# EAGLE board gnat-scale_0.1.0 (EAGLE 7.6.0)
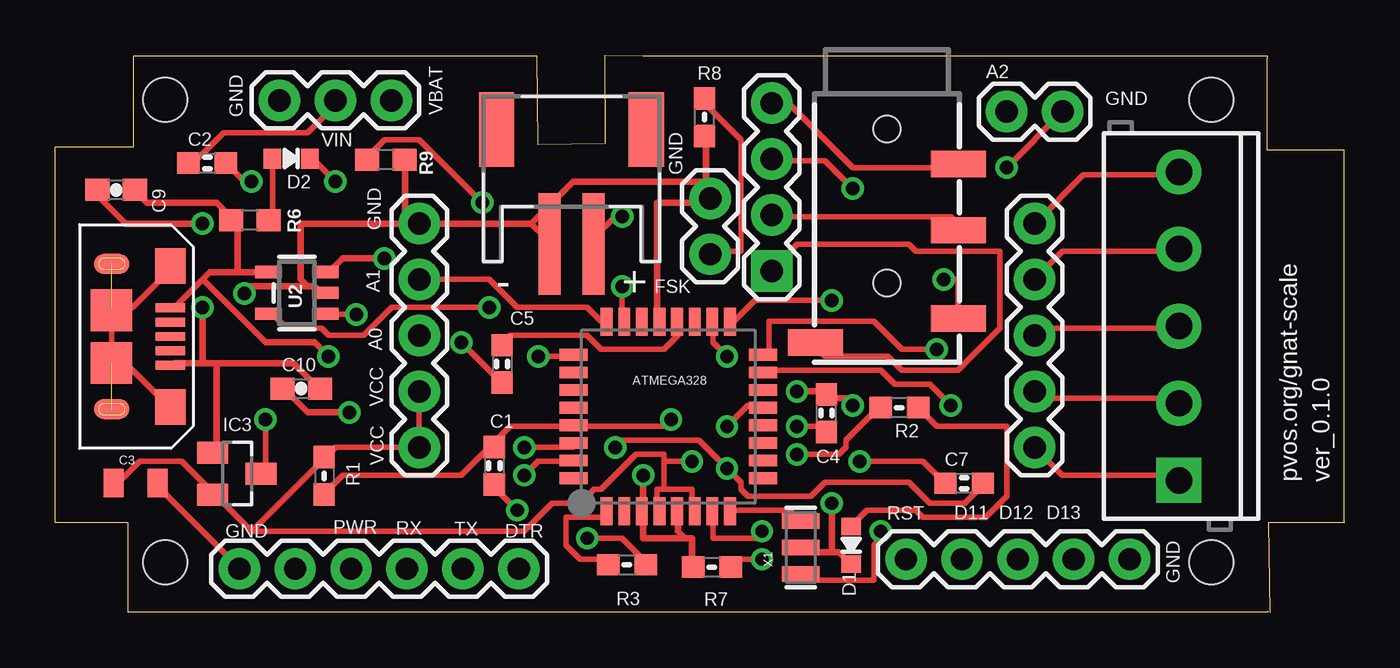
[diagram p0: board, top side]
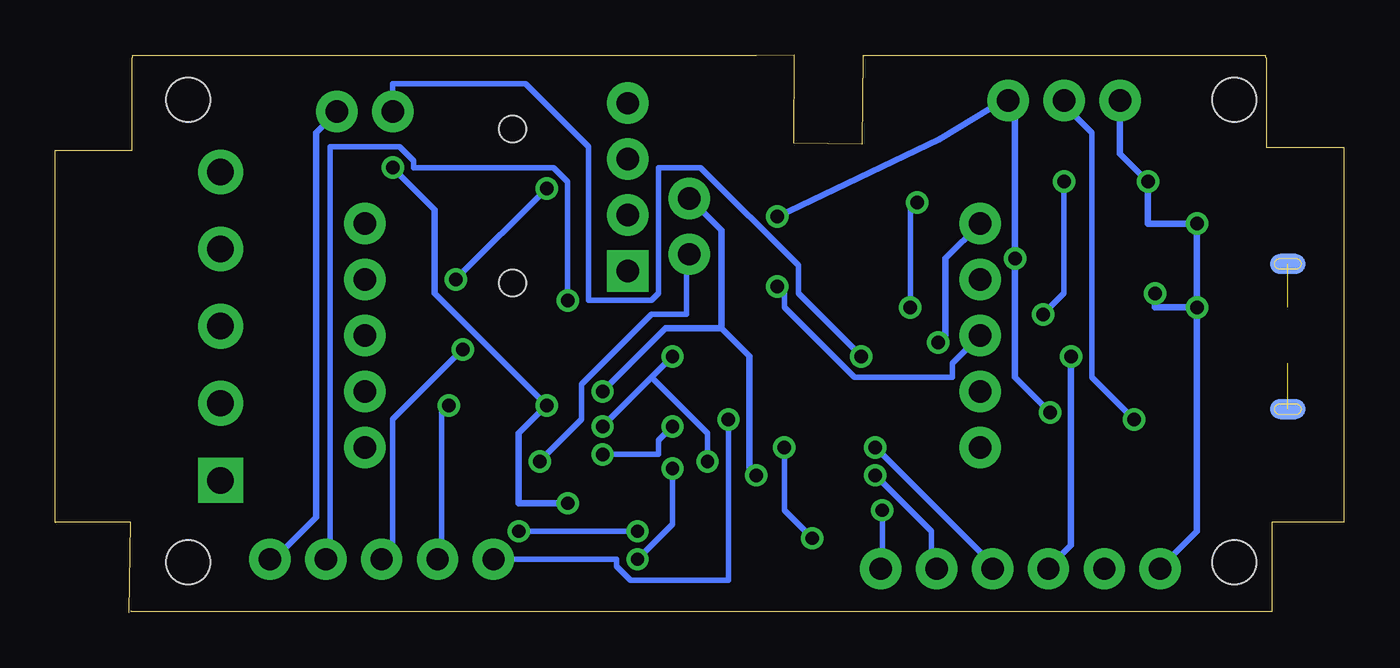
[diagram p1: board, bottom side, seen from below]

Size 58.55 x 25.31 mm. Coordinates in mm from the lower left corner, seen from the top.
Outline: 3.3,0.03 3.3,4.09 0,4.09 0,21.11 3.56,21.11 3.56,25.18
Outline: 55.19,0 55.12,4.09 58.55,4.09
Outline: 58.55,4.09 58.55,4.08
Outline: 3.3,0.03 55.1,0.03 55.1,0.08
Outline: 58.55,4.09 58.55,20.98 55.05,20.98 55.05,25.18
Outline: 3.56,25.18 3.56,25.28 21.88,25.28 21.9,21.27 25,21.29 24.97,25.31 26.7,25.28 55.05,25.28 55.05,25.18
Copper layers (1*16): Top 0.035mm / dielectric 1.5mm / Bottom 0.035mm
Design rules "default": minimum track width 10mil, minimum drill 24mil, track to track 8mil, track to pad 8mil, pad to pad 8mil, via to via 8mil, smd to smd 8mil, copper to edge 40mil, drill to drill 8mil, minimum pad ring 10mil, minimum via ring 8mil, stop-mask expansion 4mil, vias tented up to drill 0mil, thermal gap 10mil
Net classes: 1 power: width 0.305 mm
Holes 2 mm at 5,2.28 5,23.28 52.5,2.28 52.5,23.28

## Footprints (pad centres in the part's own frame; a part is rotated, then mirrored left to right if it is on the bottom)
TQFP32-08 = smd 1.27 x 0.533: 1 -4.293,2.8; 2 -4.293,2; 3 -4.293,1.2; 4 -4.293,0.4; 5 -4.293,-0.4; 6 -4.293,-1.2; 7 -4.293,-2; 8 -4.293,-2.8; 17 4.293,-2.8; 18 4.293,-2; 19 4.293,-1.2; 20 4.293,-0.4; 21 4.293,0.4; 22 4.293,1.2; 23 4.293,2; 24 4.293,2.8 | smd 0.533 x 1.27: 9 -2.8,-4.293; 10 -2,-4.293; 11 -1.2,-4.293; 12 -0.4,-4.293; 13 0.4,-4.293; 14 1.2,-4.293; 15 2,-4.293; 16 2.8,-4.293; 25 2.8,4.293; 26 2,4.293; 27 1.2,4.293; 28 0.4,4.293; 29 -0.4,4.293; 30 -1.2,4.293; 31 -2,4.293; 32 -2.8,4.293
0603-CAP = smd 1.016 x 0.965: 1 -0.85,0; 2 0.85,0
0805-CAP = smd 0.902 x 1.3: 1 -1,0; 2 1,0
0603-CAP' = smd 1.1 x 1: 1 -0.85,0; 2 0.85,0
JST-PH-2-SMT-RA = smd 1 x 4.6: 1 1,-3.7; 2 -1,-3.7 | smd 1.6 x 3.4: NC1 -3.4,1.5; NC2 3.4,1.5
0603-LED = smd 0.8 x 0.9: MINUS -0.85,0; PLUS 0.85,0
1X06 = drill 1.016 pad 1.88: 1 0,0; 2 2.54,0; 3 5.08,0; 4 7.62,0; 5 10.16,0; 6 12.7,0
SOT23 = smd 1 x 1.4: 1 -0.95,-1.1; 2 0.95,-1.1; 3 0,1.1
1X02 = drill 1.016 pad 1.88: 1 0,0; 2 2.54,0
1X04 = drill 1.016 pad 1.88 square: 1 0,0 | drill 1.016 pad 1.88: 2 2.54,0; 3 5.08,0; 4 7.62,0
1X05 = drill 1.016 pad 1.88: 1 0,0; 2 2.54,0; 3 5.08,0; 4 7.62,0; 5 10.16,0
SCREWTERMINAL-3.5MM-5 = drill 1.2 pad 2.032 square: 1 0,0 | drill 1.2 pad 2.032: 2 3.5,0; 3 7,0; 4 10.5,0; 5 14,0
MICROUSB-RIGHT = smd 0.4 x 1.35: 1 -1.3,1.27; 2 -0.65,1.27; 3 0,1.27; 4 0.65,1.27; 5 1.3,1.27 | smd 0.9 x 1.6: S1 -3.3,-1.4; S2 3.3,-1.4 | smd 1.6 x 1.4: S3 -3.2,1.27; S4 3.2,1.27 | smd 1.9 x 1.9: S5 -1.2,-1.405; S6 1.2,-1.405 | smd 0.9 x 1.6 bottom: S7 -3.3,-1.4; S8 3.3,-1.4
1X03 = drill 1.016 pad 1.88: 1 0,0; 2 2.54,0; 3 5.08,0
AUDIO-JACK-TRRS-SMD = smd 1.2 x 2.5: EARTH 11.3,-3.25; RING1 6.2,3.25; RING2 3.2,3.25; TIP 10.2,3.25 | hole 1.2: 1.6,0; 8.6,0
0603-RES = smd 1.016 x 0.965: 1 -0.85,0; 2 0.85,0
0603-NO = smd 1.1 x 1: 1 -0.85,0; 2 0.85,0
SOT23-5 = smd 0.55 x 1.2: 1 -0.95,-1.3; 2 0,-1.3; 3 0.95,-1.3; 4 0.95,1.3; 5 -0.95,1.3
RESONATOR-SMD = smd 0.7 x 1.7: 1 -1.2,0; 2 0,0; 3 1.2,0

## Placement (x,y rotation side)
ATMEGA328  ATMega-328  [TQFP32-08]  27.84,8.9 90 top
C1  0.1  [0603-CAP]  19.95,6.66 270 top
C2  1u  [0603-CAP]  6.92,20.4 0 top
C3  10u  [0805-CAP]  3.66,5.87 0 top
C4  0.1  [0603-CAP]  35.03,9.05 90 top
C5  0.1  [0603-CAP]  20.3,11.28 270 top
C7  0.47uF  [0603-CAP]  41.28,5.87 0 top
C9  10uF  [0603-CAP']  2.77,19.18 180 top
C10  10uF  [0603-CAP']  11.18,10.17 0 top
CNL1  [JST-PH-2-SMT-RA]  23.45,20.43 0 top
D1  LED0603  [0603-LED]  36.15,3.06 90 top
D2  LED0603  [0603-LED]  10.73,20.61 180 top
FTDI  FTDI  [1X06]  8.36,1.99 0 top
IC3  MCP1703CB  [SOT23]  8.26,6.31 270 top
J1  [1X02]  29.75,16.26 90 top
J2  [1X04]  32.54,15.5 90 top
J3  [1X05]  16.54,17.66 270 top
J4  [1X05]  44.48,17.66 270 top
J6  [SCREWTERMINAL-3.5MM-5]  51.03,6 90 top
J7  [MICROUSB-RIGHT]  3.97,12.53 270 top
J8  [1X02]  45.75,22.74 180 top
J9  [1X05]  48.8,2.42 180 top
J10  [1X03]  10.19,23.25 0 top
JP1  AUDIO-JACK3  [AUDIO-JACK-TRRS-SMD]  37.78,23.55 270 top
R1  10k  [0603-RES]  12.22,6.2 270 top
R2  1k5  [0603-RES]  38.33,9.3 180 top
R3  10k  [0603-RES]  25.97,2.17 0 top
R6  10K  [0603-NO]  8.85,17.81 180 top
R7  4.7k  [0603-RES]  29.83,2.06 0 top
R8  10k  [0603-RES]  29.5,22.49 90 top
R9  4.7K  [0603-NO]  15.02,20.56 180 top
U2  MCP73831T-2ACI/OT  [SOT23-5]  10.98,14.51 90 top
X1  16 MHz  [RESONATOR-SMD]  33.86,2.95 90 top

## Library data of the parts
ATMEGA328 C1-C5 C7 D1 D2 R1-R3 R7 R8 = LowPowerLab
C9 C10 X1 = SparkFun
CNL1 = adafruit
FTDI J1 J3 J4 J8-J10 JP1 = SparkFun-Connectors
IC3 = linear
J2 = SparkFun-Connectors; PROD_ID: CONN-09696
J6 = SparkFun-Connectors; PROD_ID: Combine 8288+8399
J7 = MF_Connectors
R6 R9 U2 = microbuilder

## Nets
A0: ATMEGA328.23 J3.3
A1: ATMEGA328.24 J3.2
A2: ATMEGA328.25 J8.2
A3: ATMEGA328.26
A4_SDA: ATMEGA328.27
A5_SCL: ATMEGA328.28
A6: ATMEGA328.19
A7: ATMEGA328.22
AREF: ATMEGA328.20 C5.1
D0_RX: ATMEGA328.30 FTDI.4
D1_TX: ATMEGA328.31 FTDI.5
D2: ATMEGA328.32
D3: ATMEGA328.1 R3.1
D4: ATMEGA328.2
D5: ATMEGA328.9
D6: ATMEGA328.10
D7: ATMEGA328.11
D8: ATMEGA328.12
D9: ATMEGA328.13 R2.2
D10_SS: ATMEGA328.14
D11_MOSI: ATMEGA328.15 J9.4
D12_MISO: ATMEGA328.16 J9.3
D13_SCK: ATMEGA328.17 J9.2
GND [power]: ATMEGA328.3 ATMEGA328.5 ATMEGA328.21 C2.2 C3.2 C4.2 C5.2 C9.2 C10.2 CNL1.2 D1.MINUS FTDI.1 IC3.1 J1.2 J3.1 J7.5 J8.1 J9.1 J10.1 R7.1 R8.1 R9.1 U2.2 X1.2
N$1: ATMEGA328.7 X1.1
N$2: D1.PLUS R2.1
N$3: C7.2 R3.2 R7.2
N$4: C7.1 J1.1 R8.2
N$5: J2.1 JP1.EARTH
N$6: J2.2 JP1.RING1
N$7: J2.3 JP1.TIP
N$8: J2.4 JP1.RING2
N$9: J4.5 J6.1
N$10: J4.4 J6.2
N$11: J4.3 J6.3
N$12: J4.2 J6.4
N$13: J4.1 J6.5
N$16: R9.2 U2.5
N$17: D2.MINUS U2.1
N$18: D2.PLUS R6.1
N$20: C1.2 FTDI.6
N$21: ATMEGA328.8 X1.3
PWR [power]: C9.1 FTDI.3 J7.1 R6.2 U2.4
RST: ATMEGA328.29 C1.1 J9.5 R1.2
SLD: J7.S1 J7.S2 J7.S3 J7.S4 J7.S5 J7.S6 J7.S7 J7.S8
VBAT [power]: C10.1 CNL1.1 J10.3 U2.3
VCC: ATMEGA328.4 ATMEGA328.6 ATMEGA328.18 C3.1 C4.1 IC3.2 J3.4 J3.5 R1.1
VIN: C2.1 IC3.3 J10.2

## Tracks (layer width: path | path; a pad name or v marks a point on that pad's centre or on a via)
A0  (via drill 0.61)
  Top 0.254: v25.75,14.8 25.75,13.22 ATMEGA328.23
  Bottom 0.254: v25.75,14.8 25.43,14.49 25.43,13.85 22.26,10.68 17.81,10.68 17.81,11.31 J3.3
A1
  Top 0.254: J3.2 19.72,15.12 20.99,13.85 24.16,13.85 24.8,13.22 ATMEGA328.24
A2  (via drill 0.61)
  Top 0.254: v21.94,11.63 23.53,11.63 ATMEGA328.25
  Bottom 0.254: v21.94,11.63 24.8,14.49 24.8,15.76 29.24,20.2 31.15,20.2 31.15,14.49 31.46,14.17 34.32,14.17 34.32,21.15 37.18,24.01 43.21,24.01 J8.2
AREF
  Top 0.254: C5.1 20.35,12.26 20.67,12.58 24.16,12.58 24.8,11.95 27.65,11.95 28.29,12.58 28.29,12.9 ATMEGA328.20
D0_RX  (via drill 0.61)
  Top 0.254: v21.3,7.5 23.53,7.5 ATMEGA328.30
  Bottom 0.254: v21.3,7.5 16.22,2.42 16.22,2.1 FTDI.4
D1_TX  (via drill 0.61)
  Top 0.254: v21.3,6.23 21.94,6.87 23.53,6.87 ATMEGA328.31
  Bottom 0.254: v21.3,6.23 18.76,3.69 18.76,2.1 FTDI.5
D3
  Top 0.254: R3.1 25.11,2.42 23.84,2.42 23.21,3.06 23.21,4.33 24.8,4.33 ATMEGA328.1
D9  (via drill 0.61)
  Top 0.254: v33.69,7.18 35.59,7.18 35.91,7.5 35.91,7.82 37.18,9.09 R2.2 | v30.51,8.45 31.46,9.41 32.1,9.41 ATMEGA328.13
  Bottom 0.254: v33.69,7.18 31.15,7.18 31.15,7.82 v30.51,8.45
D11_MOSI  (via drill 0.61)
  Top 0.254: v40.67,9.41 39.72,10.36 38.13,10.36 37.5,10.99 32.42,10.99 ATMEGA328.15
  Bottom 0.254: v40.67,9.41 40.99,9.09 40.99,2.42 J9.4
D12_MISO  (via drill 0.61)
  Top 0.254: v40.04,11.95 38.45,11.95 37.18,13.22 32.42,13.22 32.42,11.95 ATMEGA328.16
  Bottom 0.254: v40.04,11.95 43.21,8.77 43.21,2.74 43.53,2.42 J9.3
D13_SCK  (via drill 0.61)
  Top 0.254: v35.27,14.17 31.78,14.17 30.83,13.22 ATMEGA328.17
  Bottom 0.254: v35.27,14.17 35.27,19.57 35.91,20.2 42.26,20.2 42.26,20.52 42.89,21.15 46.07,21.15 46.07,2.42 J9.2
GND  (via drill 0.61)
  Top 0.305: C3.2 4.79,5.6 8.29,2.1 FTDI.1 | 6.7,11.31 5.43,11.31 J7.5 | 6.7,11.31 7.33,11.31 | 7.33,11.31 10.83,11.31 11.78,10.36 C10.2 | 7.33,11.31 7.33,7.5 IC3.1 | v8.92,19.57 8.6,19.57 7.97,20.2 C2.2 | v6.7,17.66 3.21,17.66 1.94,18.93 C9.2 | v6.7,13.85 6.7,11.31 | v18.45,12.26 20.03,10.68 C5.2 | 15.91,17.66 15.91,20.52 R9.1 | 11.46,14.8 11.78,14.8 12.1,14.49 U2.2 | 11.46,14.8 11.14,15.12 11.14,17.66 15.91,17.66 | 15.91,17.66 J3.1 21.62,17.66 | 21.62,17.66 22.26,17.03 CNL1.2 | 28.61,3.37 28.92,3.37 28.92,2.1 R7.1 | 28.61,3.37 28.29,3.69 28.29,4.33 ATMEGA328.5 | 28.61,3.37 26.7,3.37 26.7,4.33 ATMEGA328.3 26.7,4.64 v26.7,6.23 | 35.27,2.74 34,2.74 X1.2 | 35.27,2.74 35.59,2.74 35.91,2.42 D1.MINUS | 29.56,19.57 29.56,18.93 J1.2 | 29.56,19.57 29.56,21.47 R8.1 | v33.69,10.04 34.96,10.04 C4.2 35.27,9.72 35.91,9.72 v36.23,9.41 | ATMEGA328.21 27.34,13.22 27.34,18.61 29.56,18.61 J1.2 | v35.27,4.96 35.27,2.74 | 21.62,17.66 23.53,19.57 29.56,19.57 | 29.56,19.57 J1.2 | v43.21,20.2 J8.1 | v8.6,14.49 8.92,14.8 11.46,14.8
  Bottom 0.305: J10.1 10.19,20.84 v8.92,19.57 8.92,17.66 v6.7,17.66 v6.7,13.85 | v6.7,13.85 6.7,3.69 8.29,2.1 FTDI.1 | J8.1 46.7,21.79 46.7,4.33 48.61,2.42 J9.1 | v18.45,12.26 18.13,12.58 18.13,16.07 J3.1 | v33.69,10.04 30.83,12.9 28.29,12.9 | 28.29,12.9 28.29,17.34 J1.2 | v35.27,4.96 37.5,4.96 37.5,8.14 v36.23,9.41 41.31,14.49 41.31,18.3 v43.21,20.2 | v26.7,6.23 27.02,6.55 27.02,11.63 28.29,12.9 | v6.7,13.85 8.6,13.85 v8.6,14.49
N$1  (via drill 0.61)
  Top 0.254: v32.1,3.69 31.78,3.37 29.88,3.37 29.88,4.33 ATMEGA328.7 | v37.5,3.69 37.5,3.37 37.18,3.06 37.18,1.47 34,1.47 X1.1
  Bottom 0.254: v37.5,3.69 v32.1,3.69
N$2
  Top 0.254: D1.PLUS 36.23,4.01 36.86,4.64 39.08,4.64 39.4,4.33 42.26,4.33 43.21,5.28 43.21,8.45 40.04,8.45 39.4,9.09 R2.1
N$3  (via drill 0.61)
  Top 0.254: v24.16,3.37 25.75,3.37 26.7,2.42 R3.2 | v25.43,7.5 25.75,7.82 29.24,7.82 v30.51,6.55 31.15,5.91 31.15,5.6 31.46,5.28 34.32,5.28 34.96,5.91 38.77,5.91 39.72,4.96 41.31,4.96 41.94,5.6 C7.2 | v32.1,2.42 31.15,2.42 30.83,2.1 R7.2
  Bottom 0.254: v24.16,3.37 25.43,4.64 v25.43,7.5 | v32.1,2.42 30.51,4.01 v30.51,6.55
N$4  (via drill 0.61)
  Top 0.254: R8.2 29.56,23.06 31.15,21.47 31.15,16.39 29.88,16.39 J1.1 | v36.54,6.87 39.4,6.87 40.35,5.91 C7.1
  Bottom 0.254: v36.54,6.87 34.64,8.77 34.64,10.36 31.46,13.53 29.88,13.53 29.88,16.07 J1.1
N$5
  Top 0.254: JP1.EARTH 34.64,11.95 34.96,11.63 37.81,11.63 38.45,10.99 40.99,10.99 42.89,12.9 42.89,16.39 39.08,16.39 38.77,16.71 33.69,16.71 32.73,15.76 J2.1
N$6
  Top 0.254: JP1.RING1 40.99,17.66 40.67,17.98 32.73,17.98 J2.2
N$7  (via drill 0.61)
  Top 0.254: v40.35,15.12 40.99,15.12 40.99,13.53 JP1.TIP | v36.23,19.25 34.96,20.52 32.73,20.52 J2.3
  Bottom 0.254: v36.23,19.25 v40.35,15.12
N$8
  Top 0.254: JP1.RING2 40.99,20.2 36.23,20.2 33.37,23.06 32.73,23.06 J2.4
N$9
  Top 0.254: J4.5 45.75,6.23 50.83,6.23 J6.1
N$10
  Top 0.254: J4.4 44.8,9.72 50.83,9.72 J6.2
N$11
  Top 0.254: J4.3 44.8,12.9 50.83,12.9 J6.3
N$12
  Top 0.254: J4.2 45.75,16.39 50.83,16.39 J6.4
N$13
  Top 0.254: J4.1 46.7,19.88 50.83,19.88 J6.5
N$16  (via drill 0.61)
  Top 0.254: v19.4,18.61 16.54,21.47 14.95,21.47 14.32,20.84 R9.2 | v19.72,13.85 15.27,13.85 14,12.58 12.41,12.58 12.1,12.9 10.51,12.9 9.87,13.53 U2.5
  Bottom 0.254: v19.4,18.61 19.72,18.3 v19.72,13.85
N$17  (via drill 0.61)
  Top 0.254: v12.73,19.57 11.78,20.52 D2.MINUS | v13.68,13.53 12.41,13.53 U2.1
  Bottom 0.254: v12.73,19.57 12.73,14.49 v13.68,13.53
N$18
  Top 0.254: D2.PLUS 9.87,20.52 9.87,17.98 R6.1
N$20  (via drill 0.61)
  Top 0.254: v20.99,4.64 20.03,5.6 C1.2
  Bottom 0.254: v20.99,4.64 20.99,2.1 FTDI.6
N$21
  Top 0.254: ATMEGA328.8 30.83,4.64 33.37,4.64 33.69,4.33 X1.3
PWR  (via drill 0.61)
  Top 0.305: 8.29,15.44 8.29,17.66 R6.2 7.97,17.98 7.33,18.61 4.16,18.61 3.84,18.93 C9.1 | 8.29,15.44 9.56,15.44 U2.4 | 6.7,15.12 7.02,15.44 8.29,15.44 | 6.7,15.12 5.43,13.85 J7.1 | v12.41,11.63 11.78,12.26 9.56,12.26 6.7,15.12
  Bottom 0.305: v12.41,11.63 12.41,3.06 13.37,2.1 FTDI.3
RST  (via drill 0.61)
  Top 0.254: R1.2 12.41,5.6 13.05,6.23 18.45,6.23 19.72,7.5 C1.1 20.03,7.82 20.67,8.45 23.53,8.45 ATMEGA328.29 23.84,8.45 27.65,8.45 v27.97,8.77
  Bottom 0.254: J9.5 33.05,2.42 33.05,2.1 32.42,1.47 27.97,1.47 v27.97,8.77
SLD  (4 unrouted)
  Top 0.254: J7.S4 5.11,9.41 3.21,11.31 2.57,11.31 J7.S6 2.57,11.63 2.57,13.53 J7.S5 2.57,13.85 3.52,13.85 5.11,15.44 J7.S3
VBAT  (via drill 0.61)
  Top 0.305: v13.37,9.09 11.46,9.09 10.51,10.04 C10.1 | v14.95,16.07 13.05,16.07 12.41,15.44 U2.3 | v25.75,17.98 25.43,17.98 24.48,17.03 CNL1.1
  Bottom 0.305: v13.37,9.09 14.95,10.68 v14.95,16.07 14.95,22.74 15.27,23.06 J10.3 15.27,23.38 18.4,21.5 v25.75,17.98
VCC  (via drill 0.61)
  Top 0.254: J3.4 J3.5 12.73,7.5 12.41,7.18 R1.1 12.1,6.87 8.92,3.69 | v33.69,8.45 34.96,8.45 C4.1 | v30.51,11.63 29.88,12.26 29.88,12.9 ATMEGA328.18 | 27.65,5.6 28.92,5.6 28.92,4.64 ATMEGA328.6 | 27.65,5.6 27.34,5.6 27.34,4.64 ATMEGA328.4 | C3.1 2.89,5.91 3.84,6.87 5.75,6.87 7.02,5.6 IC3.2 7.33,5.28 8.92,3.69 | 27.65,6.87 27.65,7.18 26.38,7.18 24.8,5.6 24.48,5.6 23.84,4.96 22.57,4.96 21.3,3.69 8.92,3.69 | 27.65,6.87 27.65,5.6 | 27.65,6.87 v28.92,6.87
  Bottom 0.254: v30.51,11.63 31.46,10.68 | 31.46,10.68 v33.69,8.45 | 31.46,10.68 28.92,8.14 v28.92,6.87
VIN  (via drill 0.61)
  Top 0.254: C2.1 6.38,20.52 7.65,21.79 11.46,21.79 12.73,23.06 J10.2 | v9.56,8.77 9.56,6.55 IC3.3
  Bottom 0.254: v9.56,8.77 11.46,10.68 11.46,21.79 12.73,23.06 J10.2

## Text on the board
tPlace: A2 | GND | VBAT | GND | VIN | GND | GND | A1 | FSK | A0 | VCC | VCC | pvos.org/gnat-scale | ver_0.1.0 | RST | GND | PWR | RX | TX | DTR | D11 | D12 | D13 | GND